# Altium PCB AnalExtend.PcbDoc (part 3 of 3)
Units mm, origin at the board's own origin, x right, y up, seen from the top; angles counter-clockwise.
Board outline 190 x 160 mm, 2 copper layers (Top Layer, Bottom Layer), stack 1.536 mm thick; 277 components, 158 nets, 942 pads, 254 vias.
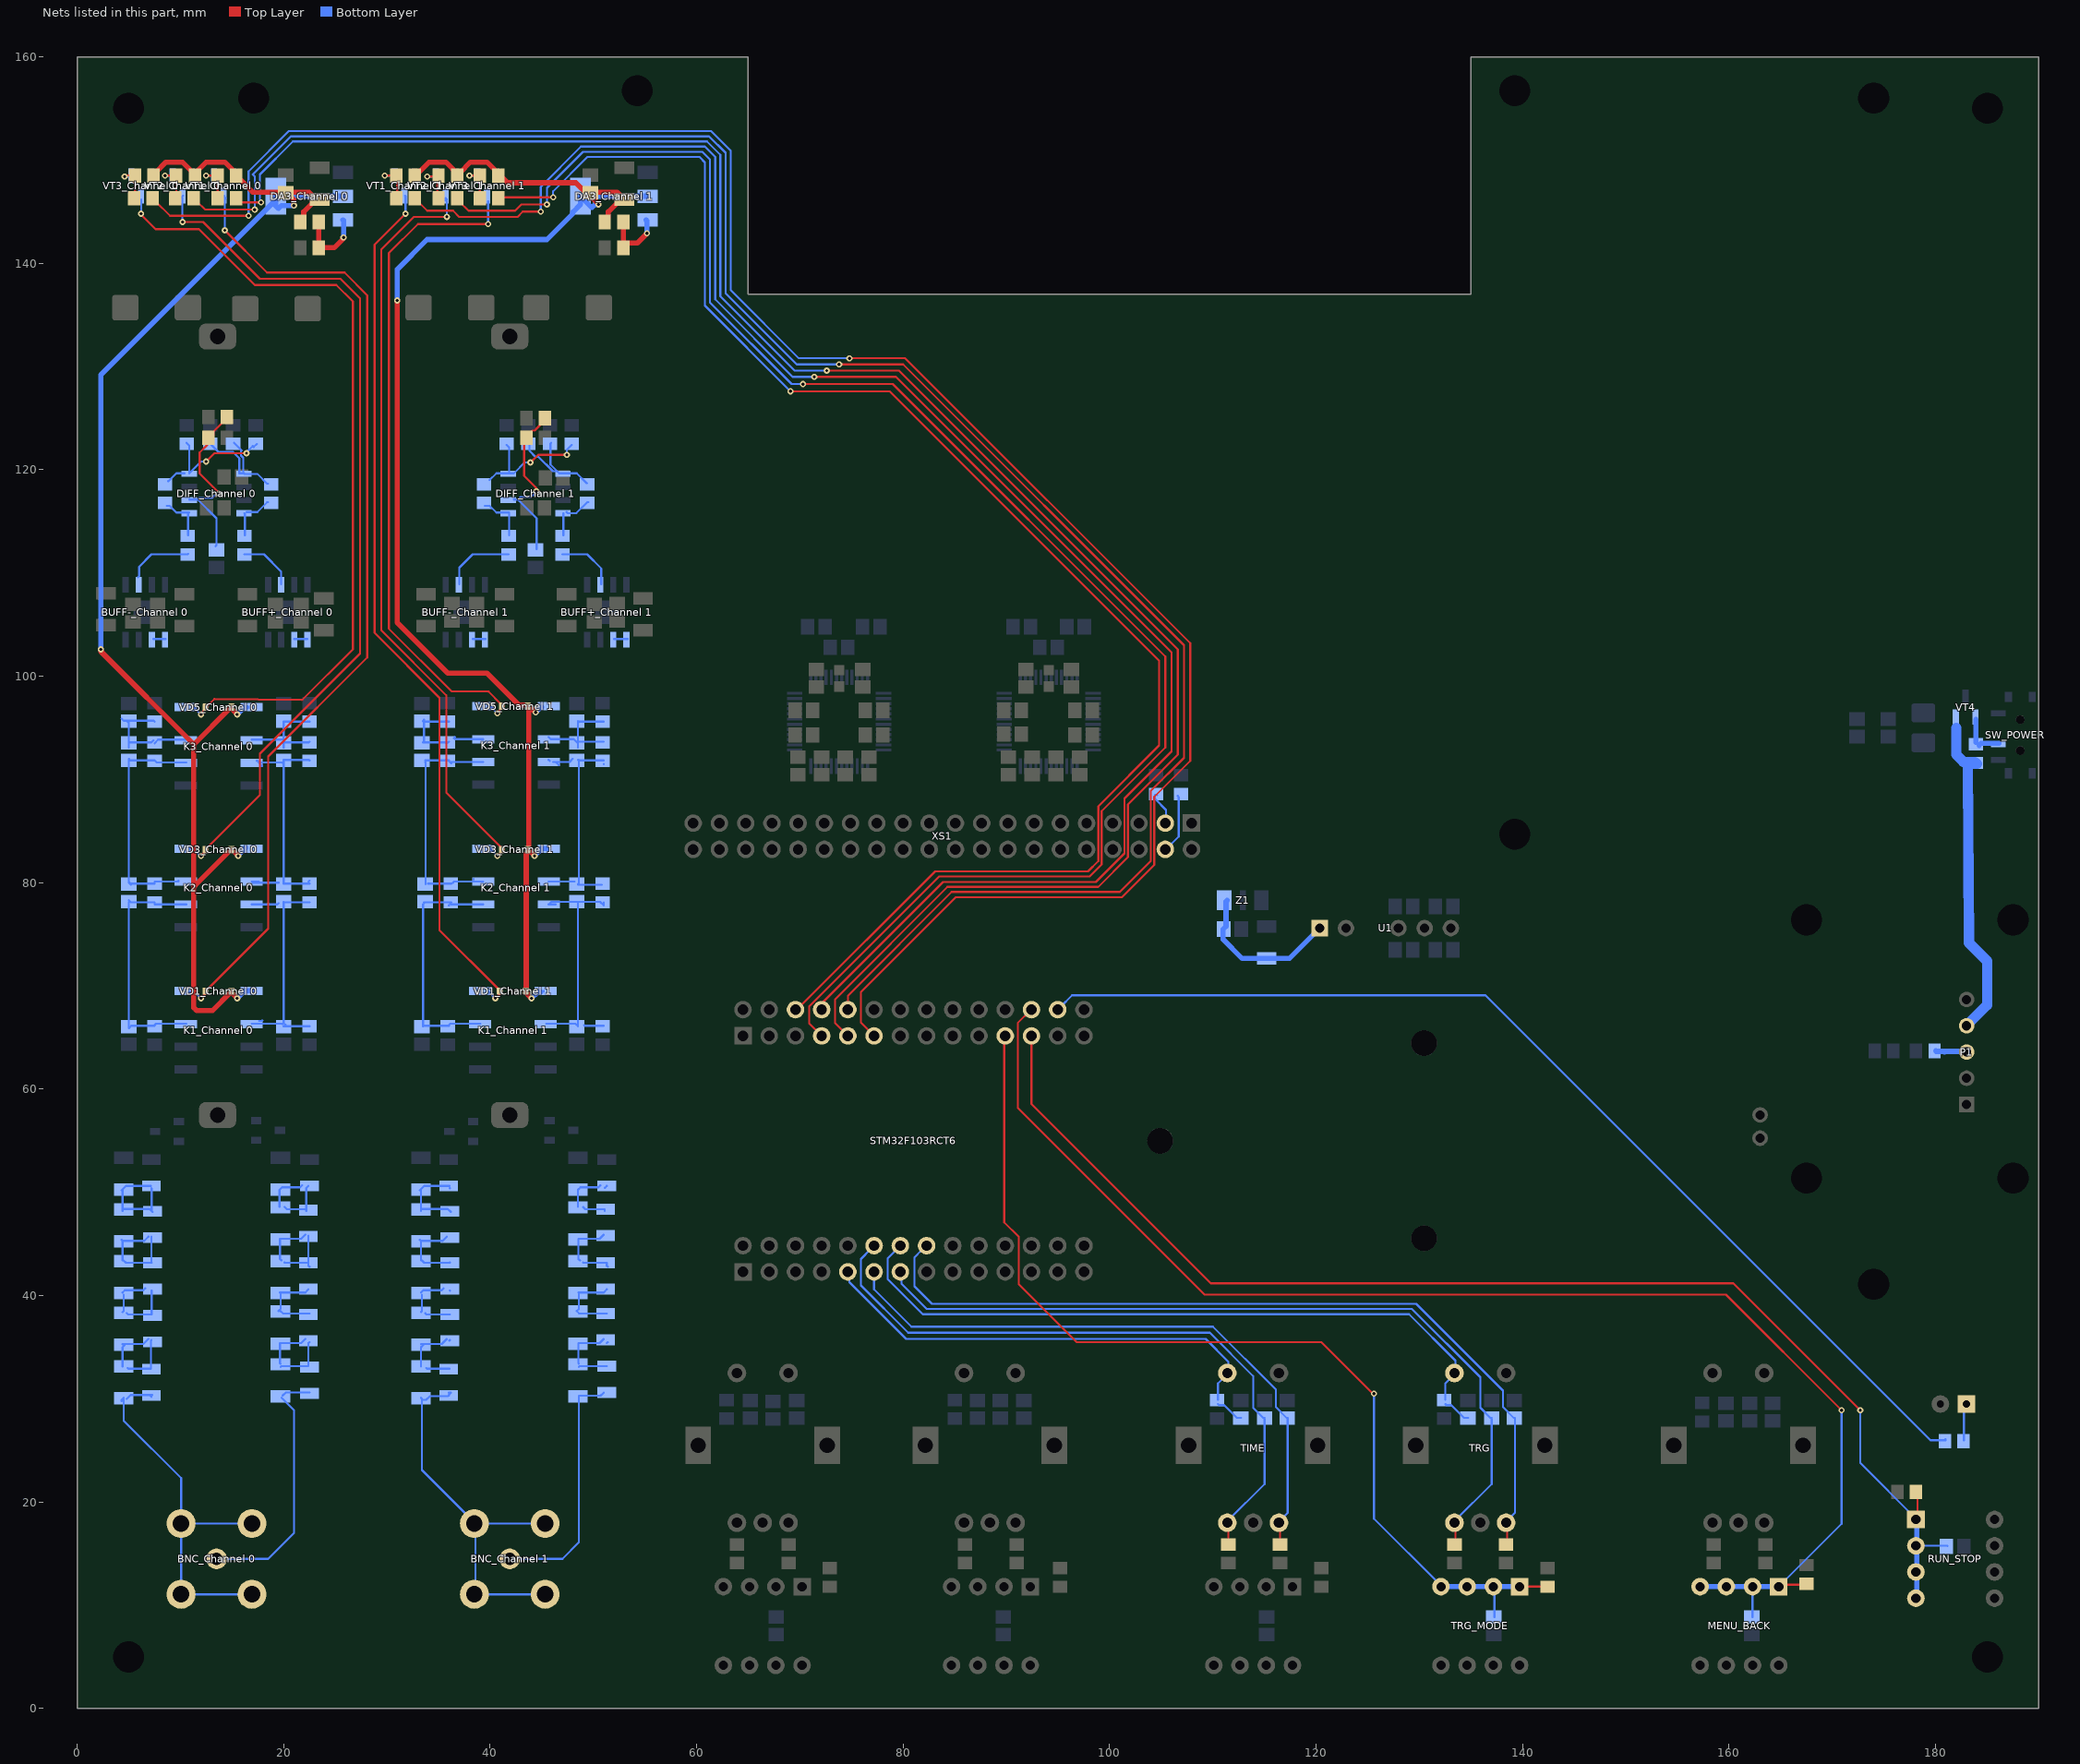
[diagram p3: the nets of this part, all layers, seen from the top]

## Via types
v1: diameter 0.6, hole 0.3, Top Layer to Bottom Layer, tented both sides, 254 vias

## Nets (pads, with @x,y where several pads share a name; then routed paths per layer and width w, separated by ;. In a path a pad name is that pad's centre, name@x,y a point inside that pad or via, vN(x,y) a via of type N, cw(c..) or ccw(c..) an arc to the next point about the centre after c; other vN are vias at no path point) (continued)
"LDO_3V_Channel 0": "C41_Channel 0.1" "C42_Channel 0.1" "DA3_Channel 0.2" "K1_Channel 0.8" "K2_Channel 0.8" "K3_Channel 0.8" "R4_Channel 0.2" "R5_Channel 0.1" "R19_Channel 0.2" "R28_Channel 0.2" "VD1_Channel 0.1" "VD3_Channel 0.1" "VD5_Channel 0.1" | length 142.3
  Top Layer w0.5: v1(2.3,102.6) 2.3,102.4 11.3,93.4 ; 7.6,148.6 7.6,148.8 8.6,149.8 10.2,149.8 11.4,148.6 11.4,148.5 ; 11.398,79.698 14.9,83.2 ; 11.5,148.8 12.5,149.8 14.3,149.8 15.05,149.05 15.05,148.85 15.4,148.5 15.4,148.4 15.75,148.05 15.85,148.05 17,146.9 20.25,146.9 20.35,146.9 20.625,146.625 ; 15,69.3 v1(15.5,68.8) ; 15,69.5 15,69.45 14.95,69.4 14.9,69.4 13.1,67.6 11.593,67.6 11.3,67.893 11.3,79.6 11.3,93.4 ; 15,83.25 15,83.2 v1(15.6,82.6) ; 15,97 15,96.8 v1(15.5,96.3) ; 15,97.1 15,96.95 14.95,96.9 14.8,96.9 11.3,93.4 ; v1(21,145.6) 21,146.15 20.75,146.4 20.75,146.5 20.625,146.625 ; 21.7,144.2 21.95,144.45 21.95,145 23.15,146.2 ; 23.5,146.2 23.15,146.2 ; 20.625,146.625 20.9,146.9 22.45,146.9 23.15,146.2
  Bottom Layer w0.5: v1(2.3,102.6) 2.3,129.2 19,145.9 ; v1(15.5,68.8) 16.25,69.55 16.925,69.55 ; v1(15.5,96.3) 16.2,97 16.4,97 ; v1(15.6,82.6) 15.6,82.65 16.3,83.35 16.3,83.4 ; 19.25,145.7 19.175,145.625 19.5,145.3 19.8,145.6 v1(21,145.6) ; 19.25,145.9 19.25,146.5 ; 19.4,146.5 25.75,146.5
"LDO_3V_Channel 1": "C41_Channel 1.1" "C42_Channel 1.1" "DA3_Channel 1.2" "K1_Channel 1.8" "K2_Channel 1.8" "K3_Channel 1.8" "R4_Channel 1.2" "R5_Channel 1.1" "R19_Channel 1.2" "R28_Channel 1.2" "VD1_Channel 1.1" "VD3_Channel 1.1" "VD5_Channel 1.1" | length 142.1
  Top Layer w0.2: 43.5,69.4 43.5,69.3 43.55,69.25
  Top Layer w0.5: v1(31,136.4) 31,135 31,105.2 35.9,100.3 39.7,100.3 42.8,97.2 43.7,97.2 43.8,97.1 ; 32.6,148.7 33,148.7 34.1,149.8 35.7,149.8 36.9,148.6 36.9,148.5 ; 37,148.8 37.1,148.8 38.1,149.8 39.7,149.8 40.9,148.6 40.9,148.5 ; 41.2,148.3 41.2,148.1 41.3,148.2 41.7,147.8 48.3,147.8 49.2,146.9 49.75,146.9 ; 43.5,69.4 43.5,82.8 43.8,83.1 v1(44.3,82.6) ; 43.6,69.3 43.6,69.2 v1(44,68.8) ; 43.75,83.2 43.75,97.1 43.8,97.1 ; v1(44.4,96.5) 43.8,97.1 ; 49.5,146.7 v1(50.5,145.7) ; 50,146.7 50.2,146.9 52.3,146.9 53,146.2 52.65,146.2 51.45,145 51.45,144.45 51.4,144.4 51.1,144.4
  Bottom Layer w0.2: 44.7,69.4 44.8,69.5 45.2,69.5
  Bottom Layer w0.5: v1(31,136.4) 31,139.4 33.9,142.3 45.5,142.3 48,144.8 48,144.95 48.75,145.7 48.75,146.5 ; v1(44,68.8) 44.6,69.4 44.7,69.4 44.9,69.4 ; v1(44.3,82.6) 45,83.3 45.675,83.3 ; v1(44.4,96.5) 44.9,97 45,97 ; v1(50.5,145.7) 50.15,145.7 49.85,145.4 48.75,146.5 ; 55.25,146.5 48.75,146.5
LED_RUN: R31.2 STM32F103RCT6.26 | length 104.5
  Bottom Layer w0.2: STM32F103RCT6.26@94.9,68 95.27,68 96.37,69.1 136.4,69.1 179.5,26 180.85,26 180.95,26.1 R31.2@180.95,26
MENU: C82.1 MENU_BACK.1 MENU_BACK.2 MENU_BACK.3 MENU_BACK.4 R51.1 STM32F103RCT6.24 | length 134.3
  Top Layer w0.2: STM32F103RCT6.24@92.3,67.6 91.1,66.4 91.1,58.2 109.2,40.1 159.7,40.1 v1(170.9,28.9) ; MENU_BACK.1@164.81,11.81 165,12 R51.1@167.5,12
  Bottom Layer w0.2: C82.1@162.25,8.85 162.27,8.87 162.27,11.23 MENU_BACK.2@162.25,11.25 ; MENU_BACK.1@164.81,11.81 170.9,17.9 v1(170.9,28.9)
  Bottom Layer w0.5: MENU_BACK.4@157.1,11.8 157.11,11.81 MENU_BACK.4@157.19,11.81 MENU_BACK.3@159.73,11.81 MENU_BACK.2@162.27,11.81 MENU_BACK.1@164.81,11.81
"NetBNC_Channel 0_1": "BNC_Channel 0.1" "C45_Channel 0.1" "R7_Channel 0.1" | length 24.9
  Bottom Layer w0.2: 13.5,14.5 18.5,14.5 21,17 21,28.9 19.8,30.1 ; 19.9,30.3 20.225,30.625 22.5,30.625
"NetBNC_Channel 0_2": "BNC_Channel 0.2" "BNC_Channel 0.3" "BNC_Channel 0.4" "BNC_Channel 0.5" "C52_Channel 0.1" "R22_Channel 0.1" | length 37.9
  Bottom Layer w0.2: 4.3,29.8 4.3,29.9 4.5,30.1 4.5,27.9 10.07,22.33 10.07,18.07 10,18 ; 4.8,30 5.175,30.375 7.25,30.375 ; 7.1,30.3 7.2,30.2 ; 10,11.5 10.07,11.57 10.07,17.93 16.93,17.93 17,18 ; 10.07,11.07 16.93,11.07 17,11
"NetBNC_Channel 1_1": "BNC_Channel 1.1" "C45_Channel 1.1" "R7_Channel 1.1" | length 23.9
  Bottom Layer w0.2: 42,14.5 47,14.5 48.6,16.1 48.6,30.2 ; 48.6,30.3 50.7,30.3 51,30.6
"NetBNC_Channel 1_2": "BNC_Channel 1.2" "BNC_Channel 1.3" "BNC_Channel 1.4" "BNC_Channel 1.5" "C52_Channel 1.1" "R22_Channel 1.1" | length 38.5
  Bottom Layer w0.2: 33.3,30.1 33.4,30 33.4,29.9 ; 36,30.6 36.2,30.6 36,30.4 36,30.325 35.925,30.25 34.15,30.25 33.8,29.9 33.4,29.9 ; 38.47,11.17 38.57,11.27 38.57,17.93 33.4,23.1 33.4,29.9 ; 38.57,11.07 45.43,11.07 45.47,11.07 45.6,11.2 ; 38.6,18 38.67,17.93 45.43,17.93 ; 45.3,11.6 45.33,11.63
"NetBUFF+_Channel 0_1": "BUFF+_Channel 0.1" "BUFF+_Channel 0.2" | length 1.3
  Bottom Layer w0.2: 21,103.6 21.035,103.6 22.305,103.6
"NetBUFF+_Channel 0_6": "BUFF+_Channel 0.6" "RG+_Channel 0.1" | length 5.5
  Bottom Layer w0.2: 16.2,111.8 18.1,111.8 19.765,110.135 19.765,108.9
"NetBUFF+_Channel 1_1": "BUFF+_Channel 1.1" "BUFF+_Channel 1.2" | length 1.3
  Bottom Layer w0.2: 52,103.6 52.035,103.6 53.305,103.6
"NetBUFF+_Channel 1_6": "BUFF+_Channel 1.6" "RG+_Channel 1.1" | length 5.9
  Bottom Layer w0.2: 47,111.8 49.4,111.8 50.765,110.435 50.765,108.9
"NetBUFF-_Channel 0_1": "BUFF-_Channel 0.1" "BUFF-_Channel 0.2" | length 1.2
  Bottom Layer w0.2: 7.4,103.6 8.555,103.6
"NetBUFF-_Channel 0_6": "BUFF-_Channel 0.6" "RG-_Channel 0.1" | length 6.3
  Bottom Layer w0.2: 5.9,109.6 6,109.7 6,110.6 7.2,111.8 10.7,111.8 10.75,111.85
"NetBUFF-_Channel 1_1": "BUFF-_Channel 1.1" "BUFF-_Channel 1.2" | length 1.3
  Bottom Layer w0.2: 38.3,103.6 39.555,103.6
"NetBUFF-_Channel 1_6": "BUFF-_Channel 1.6" "RG-_Channel 1.1" | length 6.9
  Bottom Layer w0.2: 37.015,108.9 37.015,110.515 38.3,111.8 41.8,111.8
NetC25_1: C25.1 C26.1 U1.1 Z1.3 | length 15.3
  Bottom Layer w0.5: Z1.3@111.4,78.3 111.275,78.175 111.275,75.775 111,75.5 111,74.5 112.85,72.65 115.3,72.65 117.41,72.65 U1.1@120.36,75.6
"NetC45_Channel 0_2": "C45_Channel 0.2" "C46_Channel 0.1" "R7_Channel 0.2" "R8_Channel 0.1" | length 9.7
  Bottom Layer w0.2: 19.7,33.1 19.775,33.175 22.4,33.175 22.4,35.4 22.5,35.5 ; 19.7,33.4 19.65,33.45 19.65,35.4 21.7,35.4 22.1,35.8
"NetC45_Channel 1_2": "C45_Channel 1.2" "C46_Channel 1.1" "R7_Channel 1.2" "R8_Channel 1.1" | length 7.5
  Bottom Layer w0.2: 48.6,33.1 48.675,33.175 51.3,33.175 ; 48.6,33.4 48.55,33.45 48.55,35.4 50.6,35.4 51,35.8 ; 51.3,35.4 51.4,35.5
"NetC46_Channel 0_2": "C46_Channel 0.2" "C47_Channel 0.1" "R8_Channel 0.2" "R9_Channel 0.1" | length 7.8
  Bottom Layer w0.2: 19.5,38.5 19.7,38.7 19.7,40.25 19.65,40.3 22.1,40.3 22.4,40.6 22.4,40.625 ; 19.6,38.6 19.725,38.475 19.925,38.275 22.5,38.275
"NetC46_Channel 1_2": "C46_Channel 1.2" "C47_Channel 1.1" "R8_Channel 1.2" "R9_Channel 1.1" | length 7.8
  Bottom Layer w0.2: 51.3,38.275 48.625,38.275 48.4,38.5 48.6,38.7 48.6,40.25 48.55,40.3 51,40.3 51.3,40.6 51.3,40.625
"NetC47_Channel 0_2": "C47_Channel 0.2" "C48_Channel 0.1" "R9_Channel 0.2" "R10_Channel 0.1" | length 10.2
  Bottom Layer w0.2: 19.8,43.4 19.65,43.55 19.65,45.5 21.7,45.5 22.1,45.9 ; 20.1,43.2 20.125,43.175 22.4,43.175 ; 22.4,45.825 22.4,43.175 ; 22.5,42.8 22.4,42.9 22.4,43.175
"NetC47_Channel 1_2": "C47_Channel 1.2" "C48_Channel 1.1" "R9_Channel 1.2" "R10_Channel 1.1" | length 7.5
  Bottom Layer w0.2: 48.7,43.4 48.55,43.55 48.55,45.5 50.6,45.5 51,45.9 ; 49,43.2 49.025,43.175 51.3,43.175 51.3,42.9 51.4,42.8
"NetC48_Channel 0_2": "C48_Channel 0.2" "C49_Channel 0.1" "R10_Channel 0.2" "R11_Channel 0.1" | length 8.7
  Bottom Layer w0.2: 19.6,48.6 19.6,50.25 19.65,50.3 19.85,50.5 21.6,50.5 21.8,50.7 ; 20.1,48.6 20.325,48.375 22.2,48.375 ; 22.2,48.2 22.2,48.375 ; 22.4,50.625 22.2,50.425 22.2,48.375
"NetC48_Channel 1_2": "C48_Channel 1.2" "C49_Channel 1.1" "R10_Channel 1.2" "R11_Channel 1.1" | length 6.7
  Bottom Layer w0.2: 48.5,48.6 48.5,50.25 48.55,50.3 48.75,50.5 50.5,50.5 50.7,50.7 ; 49,48.6 49.225,48.375 51.1,48.375 51.1,48.2 ; 51.1,50.425 51.3,50.625
"NetC52_Channel 0_2": "C52_Channel 0.2" "C53_Channel 0.1" "R22_Channel 0.2" "R23_Channel 0.1" | length 9.9
  Bottom Layer w0.2: 4.4,33.15 4.4,35 4.6,35.2 ; 4.4,35.3 4.42,35.32 6.42,35.32 6.9,35.8 ; 4.9,33 4.975,32.925 7.15,32.925 7.15,35.65 7.2,35.7
"NetC52_Channel 1_2": "C52_Channel 1.2" "C53_Channel 1.1" "R22_Channel 1.2" "R23_Channel 1.1" | length 7.2
  Bottom Layer w0.2: 33.3,33.15 33.3,35 33.5,35.2 ; 33.3,35.3 33.32,35.32 35.32,35.32 35.8,35.8 ; 33.8,33 33.875,32.925 36.05,32.925 ; 36.05,35.65 36.1,35.7
"NetC53_Channel 0_2": "C53_Channel 0.2" "C54_Channel 0.1" "R23_Channel 0.2" "R24_Channel 0.1" | length 8.9
  Bottom Layer w0.2: 4.4,38.4 4.5,38.5 4.5,40.1 ; 4.4,40.3 4.62,40.52 6.42,40.52 6.6,40.7 ; 4.8,38.3 4.925,38.175 7.22,38.175 7.22,40.48 7.2,40.5
"NetC53_Channel 1_2": "C53_Channel 1.2" "C54_Channel 1.1" "R23_Channel 1.2" "R24_Channel 1.1" | length 6.6
  Bottom Layer w0.2: 33.3,38.4 33.4,38.5 33.4,40.1 ; 33.3,40.3 33.52,40.52 35.32,40.52 35.5,40.7 ; 33.7,38.3 33.825,38.175 36.12,38.175 ; 36.1,40.5 36.12,40.48
"NetC54_Channel 0_2": "C54_Channel 0.2" "C55_Channel 0.1" "R24_Channel 0.2" "R25_Channel 0.1" | length 10.1
  Bottom Layer w0.2: 4.3,45.4 4.4,45.3 ; 4.4,43.4 4.4,45.3 ; 4.5,43.4 4.725,43.175 7.22,43.175 7.2,43.195 7.2,45.7 ; 6.9,45.7 6.5,45.3 4.4,45.3
"NetC54_Channel 1_2": "C54_Channel 1.2" "C55_Channel 1.1" "R24_Channel 1.2" "R25_Channel 1.1" | length 7.5
  Bottom Layer w0.2: 33.2,45.4 33.3,45.3 ; 33.3,43.4 33.3,45.3 ; 33.4,43.4 33.625,43.175 36.12,43.175 36.1,43.195 ; 35.8,45.7 35.4,45.3 33.3,45.3
"NetC55_Channel 0_2": "C55_Channel 0.2" "C56_Channel 0.1" "R25_Channel 0.2" "R26_Channel 0.1" | length 10.3
  Bottom Layer w0.2: 4.3,50.2 4.725,50.625 7.15,50.625 ; 4.4,48.2 4.4,50.2 ; 4.4,48.4 7,48.4 7.22,48.18 ; 7.2,50.4 7.22,50.38 7.22,48.18 ; 7.3,48.1 7.22,48.18
"NetC55_Channel 1_2": "C55_Channel 1.2" "C56_Channel 1.1" "R25_Channel 1.2" "R26_Channel 1.1" | length 8.1
  Bottom Layer w0.2: 33.2,50.2 33.625,50.625 36.05,50.625 ; 33.3,48.2 33.3,50.2 ; 33.3,48.4 35.9,48.4 36.12,48.18 36.2,48.1 ; 36.1,50.4 36.12,50.38
"NetC61_Channel 0_1": "C61_Channel 0.1" "DIFF_Channel 0.2" "R29_Channel 0.2" "R30_Channel 0.1" | length 16.8
  Top Layer w0.2: 12.6,122.4 11.873,121.673 11.873,119.627 13.7,117.8 v1(13.7,117.7) ; 12.9,123.1 13.2,123.4 13.2,123.7 14.5,125 14.5,125.1
  Bottom Layer w0.2: 10.85,117.115 11.685,117.115 ; 13.4,112.6 13.5,112.7 13.5,115.3 11.685,117.115 ; v1(13.7,117.7) 13.476,117.7 13.049,117.273 11.843,117.273 11.685,117.115
"NetC61_Channel 1_1": "C61_Channel 1.1" "DIFF_Channel 1.2" "R29_Channel 1.2" "R30_Channel 1.1" | length 15.9
  Top Layer w0.2: 43.3,122.8 43.3,119.4 44.475,118.225 v1(44.475,117.9) ; 43.8,123.3 43.8,123.5 44.1,123.8 44.3,123.8 45.4,124.9 45.4,125
  Bottom Layer w0.2: 42.3,117.1 42.7,117.1 44.5,115.3 44.5,112.3 ; 42.7,117.115 42.945,117.36 43.935,117.36 v1(44.475,117.9)
"NetDA3_Channel 0_1": "DA3_Channel 0.1" "R5_Channel 0.2" "R6_Channel 0.2" | length 7
  Top Layer w0.5: 23.4,141.5 24.9,141.5 25.8,142.4 v1(25.8,142.5) ; 23.4,144 23.4,141.7 23.5,141.6
  Bottom Layer w0.5: 25.75,144.21 25.8,144.16 v1(25.8,142.5)
"NetDA3_Channel 1_1": "DA3_Channel 1.1" "R5_Channel 1.2" "R6_Channel 1.2" | length 6.8
  Top Layer w0.5: 52.9,144 52.9,141.6 ; 53,141.4 52.9,141.5 52.9,141.6 ; v1(55.2,142.9) 54.25,141.95 53.25,141.95 52.9,141.6
  Bottom Layer w0.5: 55.1,144.2 55.2,144.1 v1(55.2,142.9)
"NetDIFF_Channel 0_1": "DIFF_Channel 0.1" "RF-_Channel 0.1" "RG-_Channel 0.2" | length 4.6
  Bottom Layer w0.2: 8.7,116.5 8.95,116.5 9.605,115.845 10.75,115.845 10.85,115.845 ; 10.75,113.65 10.75,115.75 10.8,115.8
"NetDIFF_Channel 0_4": "DIFF_Channel 0.4" "RF-_Channel 0.2" "ROUTA+_Channel 0.1" "ROUTB+_Channel 0.1" | length 12.8
  Top Layer w0.2: v1(12.5,120.8) 13.3,121.6 v1(16.4,121.6)
  Bottom Layer w0.2: 8.8,118.9 8.85,118.9 9.605,119.655 10.4,119.655 ; 10.6,122.6 10.85,122.35 10.85,119.655 11.995,120.8 v1(12.5,120.8) ; v1(16.4,121.6) 16.4,121.7 17,122.3 17.05,122.25 17.1,122.2 17.4,122.5
"NetDIFF_Channel 0_5": "DIFF_Channel 0.5" "RF+_Channel 0.2" "ROUTA-_Channel 0.1" "ROUTB-_Channel 0.1" | length 11.4
  Bottom Layer w0.2: 12.9,122.6 13,122.5 13,122.4 13.675,121.725 15.075,121.725 15.7,121.1 15.7,119.655 16.15,119.655 16.205,119.6 17.45,119.6 18.4,118.65 18.5,118.65 ; 15.2,122.6 15.927,121.873 15.873,121.818 15.873,121.382 16.1,121.155 16.1,119.8
"NetDIFF_Channel 0_8": "DIFF_Channel 0.8" "RF+_Channel 0.1" "RG+_Channel 0.2" | length 4.7
  Bottom Layer w0.2: 16.2,115.8 16.25,115.75 16.25,113.65 ; 16.4,115.9 17.45,115.9 18.4,116.85 18.5,116.85
"NetDIFF_Channel 1_1": "DIFF_Channel 1.1" "RF-_Channel 1.1" "RG-_Channel 1.2" | length 4.8
  Bottom Layer w0.2: 39.5,116.5 39.95,116.5 40.605,115.845 41.85,115.845 ; 41.8,115.8 41.85,115.75 41.85,113.65
"NetDIFF_Channel 1_4": "DIFF_Channel 1.4" "RF-_Channel 1.2" "ROUTA+_Channel 1.1" "ROUTB+_Channel 1.1" | length 12.5
  Top Layer w0.2: v1(43.9,120.7) 44.65,121.45 v1(47.425,121.45)
  Bottom Layer w0.2: 39.95,119 40.605,119.655 41.755,119.655 41.8,119.7 ; 41.6,122.4 41.85,122.15 41.85,119.655 42.3,119.655 43.345,120.7 v1(43.9,120.7) ; v1(47.425,121.45) 47.425,121.925 47.9,122.4
"NetDIFF_Channel 1_5": "DIFF_Channel 1.5" "RF+_Channel 1.2" "ROUTA-_Channel 1.1" "ROUTB-_Channel 1.1" | length 10.8
  Bottom Layer w0.2: 43.8,122.4 43.8,121.839 44.387,121.252 44.687,121.252 46.084,119.855 46.5,119.855 46.7,119.655 ; 45.9,122.6 45.848,122.548 45.848,120.507 46.7,119.655 ; 49.4,118.7 49.35,118.7 48.395,119.655 47.15,119.655 46.7,119.655
"NetDIFF_Channel 1_8": "DIFF_Channel 1.8" "RF+_Channel 1.1" "RG+_Channel 1.2" | length 4.7
  Bottom Layer w0.2: 47.1,113.65 47.1,115.8 ; 47.4,115.9 47.5,115.8 48.35,115.8 49.4,116.85 49.5,116.85
"NetK1_Channel 0_1": "K1_Channel 0.1" "VD1_Channel 0.2" "VT1_Channel 0.3" | length 96.2
  Top Layer w0.2: v1(12,68.8) 12.371,69.171 12.371,69.371 12.5,69.5 ; 12.4,69.6 12.55,69.6 18.5,75.55 18.5,92.227 28.1,101.827 28.1,136.9 25.9,139.1 18.4,139.1 v1(14.3,143.2)
  Bottom Layer w0.2: 10.8,69.4 11.4,69.4 v1(12,68.8) ; 14.25,146.55 14.2,146.5 14.4,146.3 14.3,146.2 v1(14.3,143.2)
"NetK1_Channel 1_1": "K1_Channel 1.1" "VD1_Channel 1.2" "VT1_Channel 1.3" | length 85.2
  Top Layer w0.2: v1(31.8,144.8) 28.8,141.8 28.8,104.2 35.1,97.9 35.1,75.4 40.9,69.6 ; v1(40.5,68.8) 40.871,69.171 40.871,69.371 41,69.5
  Bottom Layer w0.2: 31.75,146.55 31.8,146.5 v1(31.8,144.8) ; 39.7,69.5 39.8,69.5 v1(40.5,68.8)
"NetK2_Channel 0_1": "K2_Channel 0.1" "VD3_Channel 0.2" "VT2_Channel 0.3" | length 84.5
  Top Layer w0.2: v1(10.2,144) 12.2,144 17.7,138.5 25.5,138.5 27.4,136.6 27.4,102.2 17.7,92.5 17.7,88.5 12.6,83.4 ; v1(12,82.6) 12.371,82.971 12.371,83.121 12.5,83.25
  Bottom Layer w0.2: v1(10.2,144) 10.2,146.3 10.1,146.4 10.25,146.55 ; 10.9,83.3 11.25,83.3 11.95,82.6 v1(12,82.6)
"NetK2_Channel 1_1": "K2_Channel 1.1" "VD3_Channel 1.2" "VT2_Channel 1.3" | length 74.4
  Top Layer w0.2: v1(35.8,144.5) 32.6,144.5 29.45,141.35 29.45,104.45 35.75,98.15 35.75,88.75 41.25,83.25 41.25,83.2 ; v1(40.7,82.6) 41.25,83.15
  Bottom Layer w0.2: 35.7,146.3 35.8,146.2 35.7,146.1 35.8,146 v1(35.8,144.5) ; 40,83.3 v1(40.7,82.6)
"NetK3_Channel 0_1": "K3_Channel 0.1" "VD5_Channel 0.2" "VT3_Channel 0.3" | length 77.6
  Top Layer w0.2: v1@6.2,144.7 7.6,143.3 11.8,143.3 17.2,137.9 25.1,137.9 26.7,136.3 26.7,105.8 26.7,102.7 ; v1(12,96.3) 12.048,96.348 12.048,96.498 12.5,96.95 12.5,97 12.5,97.05 12.7,97.25 12.75,97.25 13.3,97.8 21.8,97.7 26.7,102.6
  Bottom Layer w0.2: v1(6.2,144.8) 6.2,146.2 ; 11.2,97 11.3,97 v1(12,96.3)
"NetK3_Channel 1_1": "K3_Channel 1.1" "VD5_Channel 1.2" "VT3_Channel 1.3" | length 65.8
  Top Layer w0.2: v1(39.8,143.8) 33,143.8 30.2,141 30.2,104.6 36.275,98.525 36.575,98.525 39.85,98.5 41,97.35 41.05,97.35 41.25,97.15 41.25,97.1 41.25,97.05 41.2,97 ; v1(40.7,96.4) 40.748,96.448 40.748,96.548 41.2,97 ; 41.2,97.1 41.2,97
  Bottom Layer w0.2: 39.8,97.1 40,97.1 v1(40.7,96.4) ; v1(39.8,143.8) 39.8,146
NetLED_RUN_1: LED_RUN.1 R31.1 | length 3.6
  Bottom Layer w0.2: R31.1@182.75,26 182.75,29.21 LED_RUN.1@183.04,29.5
NetP1_3: P1.3 R32.1 | length 5.2
  Bottom Layer w0.5: R32.1@180,63.7 180.04,63.66 180.877,63.66 182.96,63.66 183,63.62 180.897,63.62 180.877,63.6
NetP1_4: P1.4 R55.2 VT4.2 | length 32.6
  Bottom Layer w1: 182,95 182,92.4 182.7,91.7 183.8,91.7 R55.2@183.9,91.6 ; P1.4@183,66.16 185,68.16 185,72.4 183.233,74.167 183.132,91.5 R55.2@184,91.5
NetR1_1: R1.1 XS1.3 | length 3.4
  Bottom Layer w0.2: R1.1@104.6,88.5 104.4,88.5 104.4,88.11 105.47,87.039 XS1.3@105.47,85.79
NetR2_1: R2.1 XS1.4 | length 5.7
  Bottom Layer w0.2: XS1.4@105.47,83.25 106.7,84.48 106.7,88.3 R2.1@106.6,88.4
"NetR3_Channel 0_2": "R3_Channel 0.2" "R4_Channel 0.1" "VT1_Channel 0.1" | length 3.9
  Top Layer w0.2: v1(12.5,148.5) 13.3,148.5 13.4,148.4 ; 13.6,146.25 13.6,148.4
  Bottom Layer w0.2: v1(12.5,148.5) 13.25,148.5 13.3,148.45
"NetR3_Channel 1_2": "R3_Channel 1.2" "R4_Channel 1.1" "VT1_Channel 1.1" | length 4.6
  Top Layer w0.2: v1(29.8,148.5) 31,148.5 ; 31,146.3 31,148.5 ; 31,148.6 31,148.5
  Bottom Layer w0.2: v1(29.8,148.5) 30.9,148.5
"NetR16_Channel 0_2": "R16_Channel 0.2" "R19_Channel 0.1" "VT2_Channel 0.1" | length 3.9
  Top Layer w0.2: v1(8.5,148.5) 9.6,148.5 ; 9.6,146.25 9.6,148.3
  Bottom Layer w0.2: v1(8.5,148.5) 9.1,148.5 9.2,148.4
"NetR16_Channel 1_2": "R16_Channel 1.2" "R19_Channel 1.1" "VT2_Channel 1.1" | length 4.1
  Top Layer w0.2: v1(33.9,148.4) 34.8,148.4 ; 34.9,148.5 34.9,146.4 35,146.3
  Bottom Layer w0.2: v1(33.9,148.4) 34.75,148.4 34.8,148.45
"NetR27_Channel 0_2": "R27_Channel 0.2" "R28_Channel 0.1" "VT3_Channel 0.1" | length 3.5
  Top Layer w0.2: v1(4.6,148.4) 4.7,148.5 5.5,148.5 ; 5.6,146.7 5.6,148.5
  Bottom Layer w0.2: v1(4.6,148.4) 5.25,148.4 5.3,148.45
"NetR27_Channel 1_2": "R27_Channel 1.2" "R28_Channel 1.1" "VT3_Channel 1.1" | length 4
  Top Layer w0.2: v1(38,148.5) 39,148.5 39,146.3
  Bottom Layer w0.2: v1(38,148.5) 38.8,148.5
NetR55_1: R55.1 SW_POWER.2 VT4.1 | length 4.2
  Bottom Layer w0.5: R55.1@183.9,93.6 VT4.1@183.9,95.8 ; R55.1@184.2,93.3 184.4,93.5 SW_POWER.2@186.15,93.5
RELAY_A1: "R3_Channel 0.1" STM32F103RCT6.9 | length 183.8
  Top Layer w0.2: 15.5,146.1 15.6,146.2 15.9,145.9 v1(17.8,145.9) ; v1(72.6,129.6) 79.6,129.6 106.6,102.6 106.6,92.4 101.773,87.573 101.773,82.473 98.9,79.6 84.3,79.6 73.4,68.7 73.4,66.41 STM32F103RCT6.9@74.65,65.16
  Bottom Layer w0.2: 17.7,146.2 17.7,148.6 20.9,151.8 61,151.8 62.3,150.5 62.3,136.8 69.5,129.6 v1(72.6,129.6)
RELAY_A2: "R16_Channel 0.1" STM32F103RCT6.10 | length 188.2
  Top Layer w0.2: 11.25,145.95 11.65,145.95 12.4,145.2 v1(17.2,145.2) ; v1(73.8,130.2) 80,130.2 107.2,103 107.2,92.1 103.975,88.875 103.975,82.075 101,79.1 84.7,79.1 74.65,69.05 STM32F103RCT6.10@74.65,67.7
  Bottom Layer w0.2: v1(17.2,145.2) 17.2,148.4 17,148.6 20.7,152.3 61.2,152.3 62.8,150.7 62.8,137.1 69.7,130.2 v1(73.8,130.2)
RELAY_A3: "R27_Channel 0.1" STM32F103RCT6.11 | length 196.7
  Top Layer w0.2: 7.3,146 7.6,146 9,144.6 v1(16.6,144.6) ; v1(74.8,130.8) 80.2,130.8 107.8,103.2 107.8,91.8 104.313,88.313 104.313,81.713 101.2,78.6 85.1,78.6 75.9,69.4 75.9,66.45 STM32F103RCT6.11@77.19,65.16
  Bottom Layer w0.2: v1(16.6,144.6) 16.6,148.9 20.5,152.8 61.4,152.8 63.3,150.9 63.3,137.4 69.9,130.8 v1(74.8,130.8)
RELAY_B1: "R3_Channel 1.1" STM32F103RCT6.8 | length 163.5
  Top Layer w0.2: 33,145.9 33.1,145.9 33.9,145.1 36.4,145.1 37,144.5 42.666,144.5 43.166,145 v1(44.9,145) ; v1(71.4,129) 79.3,129 106,102.3 106,92.716 101.446,88.162 101.446,82.843 98.676,80.073 83.873,80.073 72.11,68.31 STM32F103RCT6.8@72.11,67.7
  Bottom Layer w0.2: v1(44.9,145) 44.9,147.4 48.8,151.3 60.8,151.3 61.8,150.3 61.8,136.5 69.3,129 v1(71.4,129)
RELAY_B2: "R16_Channel 1.1" STM32F103RCT6.7 | length 160.6
  Top Layer w0.2: 36.9,146 37,146 37.9,145.1 42.416,145.1 43.016,145.7 v1(45.5,145.7) ; v1(70.3,128.3) 79,128.3 105.4,101.9 105.4,93.1 99.233,86.933 99.233,81.771 98.062,80.6 83.487,80.6 70.9,68.013 70.9,66.37 STM32F103RCT6.7@72.11,65.16
  Bottom Layer w0.2: v1(45.5,145.7) 45.5,147.3 49,150.8 60.562,150.8 61.3,150.062 61.3,136.2 69.2,128.3 v1(70.3,128.3)
RELAY_B3: "R27_Channel 1.1" STM32F103RCT6.6 | length 151.3
  Top Layer w0.2: 41,146.4 41.1,146.3 41.2,146.4 v1(46.1,146.4) ; v1(69.1,127.6) 78.7,127.6 104.8,101.5 104.8,93.3 98.906,87.406 98.906,82.106 97.9,81.1 83.1,81.1 69.7,67.7 STM32F103RCT6.6@69.57,67.7
  Bottom Layer w0.2: v1(46.1,146.4) 46.1,146.971 49.429,150.3 60.275,150.3 60.8,149.775 60.8,135.9 v1(69.1,127.6)
RUN: C66.1 R35.1 RUN_STOP.1 RUN_STOP.2 RUN_STOP.3 RUN_STOP.4 STM32F103RCT6.23 | length 125
  Top Layer w0.2: STM32F103RCT6.23@92.5,64.6 92.43,64.53 92.43,58.57 109.8,41.2 160.4,41.2 v1(172.7,28.9) ; R35.1@178,20.75 178.133,20.75 178.25,20.633 178.25,18.37 RUN_STOP.1@178.19,18.31
  Bottom Layer w0.2: v1(172.7,28.9) 172.7,23.8 RUN_STOP.1@178.19,18.31 ; RUN_STOP.2@178.25,15.75 178.27,15.77 181.13,15.77 C66.1@181.15,15.75
  Bottom Layer w0.5: RUN_STOP.4@177.9,10.5 178.19,10.79 RUN_STOP.3@178.19,13.23 ; RUN_STOP.2@178,15.8 178.19,15.99 RUN_STOP.1@178.19,18.31 ; RUN_STOP.3@178.1,13.3 178.19,13.39 RUN_STOP.2@178.19,15.77
"STEP1+_Channel 0": "C44_Channel 0.2" "C51_Channel 0.1" "K1_Channel 0.7" "K2_Channel 0.6" "R13_Channel 0.1" "R15_Channel 0.2" | length 23
  Bottom Layer w0.2: 16.925,66.35 19.85,66.35 19.9,66.3 ; 16.925,77.9 19.4,77.9 19.5,78 ; 17.6,66.6 17.85,66.6 17.9,66.65 17.95,66.65 ; 20,66.1 22.5,66.1 ; 20.2,66.2 20,66.4 20,78.15 20.05,78.1 22.5,78.1
"STEP1+_Channel 1": "C44_Channel 1.2" "C51_Channel 1.1" "K1_Channel 1.7" "K2_Channel 1.6" "R13_Channel 1.1" "R15_Channel 1.2" | length 23.6
  Bottom Layer w0.2: 45.425,66.35 48.25,66.35 48.4,66.2 ; 46.35,77.9 45.675,77.9 45.925,78.15 48.5,78.15 ; 48.5,66.1 48.5,78.15 ; 49.1,66.2 49.15,66.15 51,66.15 ; 51,78.1 51,77.8 50.65,78.15 48.5,78.15
"STEP1-_Channel 0": "C43_Channel 0.2" "C50_Channel 0.1" "K1_Channel 0.2" "K2_Channel 0.3" "R12_Channel 0.1" "R14_Channel 0.2" | length 23.9
  Bottom Layer w0.2: 5,78.15 5,66.1 5,65.9 5.25,66.15 7.5,66.15 7.5,66.2 7.65,66.35 10.575,66.35 ; 5,78.3 5.2,78.1 7.5,78.1 7.5,77.9 10.575,77.9
"STEP1-_Channel 1": "C43_Channel 1.2" "C50_Channel 1.1" "K1_Channel 1.2" "K2_Channel 1.3" "R12_Channel 1.1" "R14_Channel 1.2" | length 23.8
  Bottom Layer w0.2: 33.5,66.1 33.5,66.15 ; 33.6,78.1 33.7,78.1 ; 36,66.15 33.5,66.15 ; 36,66.2 36.15,66.35 39.075,66.35 ; 36,77.8 36.15,77.95 36.2,78 ; 36.2,77.9 39.325,77.9 ; 36.25,78.1 36.2,78.1 33.7,78.1 ; 33.5,66.15 33.5,77.9 33.65,78.05 33.7,78.1
"STEP2+_Channel 0": "C51_Channel 0.2" "C58_Channel 0.1" "K2_Channel 0.7" "K3_Channel 0.6" "R15_Channel 0.1" "R18_Channel 0.2" | length 23.7
  Bottom Layer w0.2: 17.4,91.8 17.45,91.8 17.6,91.65 ; 17.6,80.1 16.925,80.1 17.025,80 19.5,80 ; 17.9,91.3 17.9,91.35 17.6,91.65 ; 20,91.5 19.85,91.65 17.6,91.65 ; 22.4,80.1 22.5,80.2 ; 22.5,79.9 20,79.9 20,91.9 22.45,91.9 22.5,91.85
"STEP2+_Channel 1": "C51_Channel 1.2" "C58_Channel 1.1" "K2_Channel 1.7" "K3_Channel 1.6" "R15_Channel 1.1" "R18_Channel 1.2" | length 22
  Bottom Layer w0.2: 45.675,80.1 46.35,80.1 48.2,80.1 ; 45.675,91.9 45.775,91.8 ; 46.1,91.7 46.35,91.7 ; 46.65,91.4 46.35,91.7 ; 48,92 47.7,91.7 46.35,91.7 ; 48.5,91.9 48.55,91.85 48.6,91.85 ; 48.6,91.9 48.6,91.85 ; 50.8,79.8 48.55,79.8 48.5,79.85 48.6,79.95 48.6,91.85 ; 51,91.85 48.6,91.85
"STEP2-_Channel 0": "C50_Channel 0.2" "C57_Channel 0.1" "K2_Channel 0.2" "K3_Channel 0.3" "R14_Channel 0.1" "R17_Channel 0.2" | length 22.9
  Bottom Layer w0.2: 5,91.9 5,80 5.075,79.925 5.2,79.8 ; 5,92 5.15,91.85 7.5,91.85 7.7,91.65 10.575,91.65 ; 5.1,80 5.2,79.9 7.5,79.9 7.5,80.1 9.8,80.1 9.8,80.2
"STEP2-_Channel 1": "C50_Channel 1.2" "C57_Channel 1.1" "K2_Channel 1.2" "K3_Channel 1.3" "R14_Channel 1.1" "R17_Channel 1.2" | length 23
  Bottom Layer w0.2: 33.7,91.7 33.75,91.65 33.75,79.85 ; 33.7,91.85 36,91.85 ; 34,79.9 36.25,79.9 ; 36,91.8 36.1,91.7 ; 36.25,91.55 36.1,91.7 ; 36.4,80 36.5,80.1 39.325,80.1 ; 38.4,80.3 38.4,80.35 ; 39.325,91.7 36.1,91.7
"STEP3+_Channel 0": "C58_Channel 0.2" "C60_Channel 0.1" "K3_Channel 0.7" "R18_Channel 0.1" "R21_Channel 0.2" | length 10.7
  Bottom Layer w0.2: 16.925,93.85 19.85,93.85 20,94 ; 20,93.1 20,95.6 22.5,95.6 ; 20,93.6 22.45,93.6 22.5,93.65
"STEP3+_Channel 1": "C58_Channel 1.2" "C60_Channel 1.1" "K3_Channel 1.7" "R18_Channel 1.1" "R21_Channel 1.2" | length 10.7
  Bottom Layer w0.2: 45.675,94.1 45.875,93.9 48.1,93.9 48.5,93.5 ; 48.5,93.1 48.5,95.5 48.6,95.6 ; 48.5,93.6 48.55,93.65 51,93.65 ; 48.5,95.65 48.55,95.6 51,95.6
"STEP3-_Channel 0": "C57_Channel 0.2" "C59_Channel 0.1" "K3_Channel 0.2" "R17_Channel 0.1" "R20_Channel 0.2" | length 11.6
  Bottom Layer w0.2: 4.3,95.9 4.5,95.7 7.4,95.7 7.5,95.6 ; 4.9,95.6 5,95.5 5,93.1 ; 5,93.6 7.2,93.6 7.4,93.8 ; 7.5,93.5 7.85,93.85 10.575,93.85
"STEP3-_Channel 1": "C57_Channel 1.2" "C59_Channel 1.1" "K3_Channel 1.2" "R17_Channel 1.1" "R20_Channel 1.2" | length 10.1
  Bottom Layer w0.2: 33.5,95.65 33.55,95.6 36,95.6 ; 33.6,95.8 33.6,93.7 33.5,93.6 35.95,93.6 36,93.65 ; 36.5,94 36.6,94.1 ; 36.6,93.9 39.325,93.9
TIME_A: C71.1 R40.1 STM32F103RCT6.40 TIME.A | length 63.8
  Top Layer w0.2: R40.1@111.5,15.9 TIME.A@111.5,18
  Bottom Layer w0.2: STM32F103RCT6.40@76.8,44.7 76.8,44.45 75.9,43.55 75.9,41 80.5,36.4 109.7,36.4 113.9,32.2 113.9,29.15 114.9,28.15 C71.1@115,28.15 ; TIME.A@111.5,18 111.5,18.25 115,21.75 C71.1@115,28
TIME_B: C72.1 R42.1 STM32F103RCT6.39 TIME.B | length 60.3
  Top Layer w0.2: R42.1@116.5,15.9 TIME.B@116.5,18
  Bottom Layer w0.2: STM32F103RCT6.39@77.2,42 77.19,41.99 77.19,40.61 80.8,37 110,37 116.1,30.9 116.1,29.2 117.15,28.15 117.25,28.15 117.25,18.947 116.303,18 TIME.B@116.25,18
TIME_ENC: C73.2 R41.1 STM32F103RCT6.37 TIME.D | length 47.3
  Bottom Layer w0.2: STM32F103RCT6.37@74.8,41.9 74.8,41.3 80.3,35.8 109.3,35.8 111.5,33.6 TIME.D@111.5,32.5 ; R41.1@110.5,29.5 110.6,29.4 111.1,29.4 112.35,28.15 C73.2@112.75,28.15 ; R41.1@110.5,29.9 110.5,31.5 111.25,32.25 TIME.D@111.5,32.25
TRG_A: C67.1 R36.1 STM32F103RCT6.41 TRG.A | length 78.8
  Top Layer w0.2: R36.1@133.5,15.9 TRG.A@133.5,18
  Bottom Layer w0.2: STM32F103RCT6.41@79.7,42.1 79.85,41.95 79.85,41.15 82.3,38.7 129.3,38.7 135.9,32.1 135.9,29.15 136.9,28.15 C67.1@137,28.15 ; TRG.A@133.5,18 133.5,18.25 137,21.75 C67.1@137,28
TRG_B: C68.1 R38.1 STM32F103RCT6.44 TRG.B | length 81.2
  Top Layer w0.2: R38.1@138.5,15.9 TRG.B@138.5,18
  Bottom Layer w0.2: STM32F103RCT6.44@81.8,44.7 81.8,44.4 81.1,43.7 81.1,40.9 82.8,39.2 129.7,39.2 138.1,30.8 138.1,29.2 139.15,28.15 139.25,28.15 139.25,18.947 138.303,18 TRG.B@138.25,18
TRG_ENC: C69.2 R37.1 STM32F103RCT6.42 TRG.D | length 68.9
  Bottom Layer w0.2: STM32F103RCT6.42@79.7,44.7 79.59,44.7 78.5,43.61 78.5,41.6 81.9,38.2 129,38.2 133.5,33.7 TRG.D@133.5,32.5 ; R37.1@132.5,29.5 132.6,29.4 133.1,29.4 134.35,28.15 C69.2@134.75,28.15 ; R37.1@132.5,29.9 132.5,31.5 133.25,32.25 TRG.D@133.5,32.25
TRG_MODE: C65.1 R34.1 STM32F103RCT6.21 TRG_MODE.1 TRG_MODE.2 TRG_MODE.3 TRG_MODE.4 | length 97.3
  Top Layer w0.2: STM32F103RCT6.21@89.8,64.9 89.8,47.1 91.2,45.7 91.2,41.1 96.8,35.5 120.5,35.5 125.5,30.5 v1(125.6,30.5) ; TRG_MODE.1@139.81,11.81 142.19,11.81 R34.1@142.25,11.75
  Bottom Layer w0.2: v1(125.6,30.5) 125.6,18.4 TRG_MODE.4@132.19,11.81 ; C65.1@137.25,8.85 137.27,8.87 137.27,11.48 TRG_MODE.2@137.25,11.5
  Bottom Layer w0.5: TRG_MODE.4@132.19,11.81 134.73,11.81 137.27,11.81 TRG_MODE.1@139.81,11.81
pads on no net: "BUFF+_Channel 0.5" "BUFF+_Channel 1.5" "BUFF-_Channel 0.5" "BUFF-_Channel 1.5" "C30_Channel 0.0" "C30_Channel 1.0" "C36_Channel 0.0" "C36_Channel 1.0" "DIFF_Channel 0.7" "DIFF_Channel 1.7" "K1_Channel 0.4" "K1_Channel 0.5" "K1_Channel 1.4" "K1_Channel 1.5" "K2_Channel 0.4" "K2_Channel 0.5" "K2_Channel 1.4" "K2_Channel 1.5" "K3_Channel 0.4" "K3_Channel 0.5" "K3_Channel 1.4" "K3_Channel 1.5" "VD1_Channel 0.0" "VD1_Channel 1.0" "VD3_Channel 0.0" "VD3_Channel 1.0" "VD5_Channel 0.0" "VD5_Channel 1.0" C62.0 DA1.25 DA1.26 DA1.35 DA1.36 DA2.25 DA2.26 DA2.35 DA2.36 FUNC. SET_CH0. SET_CH1. STM32F103RCT6.1 STM32F103RCT6.2 STM32F103RCT6.3 STM32F103RCT6.4 STM32F103RCT6.5 STM32F103RCT6.12 STM32F103RCT6.13 STM32F103RCT6.14 STM32F103RCT6.15 STM32F103RCT6.16 STM32F103RCT6.18 STM32F103RCT6.25 STM32F103RCT6.27 STM32F103RCT6.29 STM32F103RCT6.30 STM32F103RCT6.32 STM32F103RCT6.43 STM32F103RCT6.45 STM32F103RCT6.46 STM32F103RCT6.47 STM32F103RCT6.48 STM32F103RCT6.50 STM32F103RCT6.53 STM32F103RCT6.54 SW_POWER. SW_POWER.3 TIME. TRG. USB-HUB.
copper on no net: | length 0.1
  Bottom Layer w0.5: 186.125,96.55 186.175,96.5

## Polygon pours and split planes (outlines as drawn)
GND on Bottom Layer "Bottom Layer-GND 2" (solid, remove dead copper, pour order 8): 188,4 188,100 147,100 147,80 60,80 60,4
GND on Bottom Layer "Bottom Layer-GND 1" (solid, remove dead copper, pour order 4): 2,155 2,134 63,134 63,155
GND on Bottom Layer "Bottom Layer-GND" (solid, remove dead copper, pour order 0): 56,102 2,102 2,114 56,114
no net on Bottom Layer "Bottom Layer-No Net" (solid, pour order 6): 97,98.8
GND on Top Layer "Top Layer-GND" (solid, remove dead copper, pour order 2): 63,155 63,135 137,135 137,155 188,155 188,4 60,4 60,102 2,102 2,155

## Keep-outs
Keep-Out Layer:
  lines w0.5: 43.375,52.05 43.375,28.125 cw(c41.875,28.125) 40.375,28.125 40.375,52.125 cw(c41.875,52.125) 43.375,52.125 ; 0,0 0,160 65,160 65,137 135,137 135,160 190,160 190,0 0,0 ; 12.125,28.125 ccw(c13.625,28.125) 15.125,28.125 15.125,52.125 ccw(c13.625,52.125) 12.125,52.125 12.125,28.125 ; 26.5,8.525 ccw(c28,8.525) 29.5,8.525 29.5,30 29.5,55.5 ccw(c28,55.5) 26.5,55.5 26.5,30 26.5,8.525 ; 26.5,62.525 ccw(c28,62.525) 29.5,62.525 29.5,95.275 ccw(c28,95.275) 26.5,95.275 26.5,62.525 ; 54.5,8.5 ccw(c56,8.5) 57.5,8.5 57.5,95.5 ccw(c56,95.5) 54.5,95.5 54.5,8.5 ; 111.125,82.75 ccw(c112.125,82.75) 112.125,81.75 133.125,81.75 ccw(c133.125,82.75) 134.125,82.75 134.125,85.75 ccw(c133.125,85.75) 133.125,86.75 112.125,86.75 ccw(c112.125,85.75) 111.125,85.75 111.125,82.75

## Other copper
Bottom Layer:
  pour cut-out: 180.5,90.4
  pour cut-out: 188,95.6 187.9,95.7 179.3,95.5 177.9,95.5 178,94.4 182.4,94.1 188,94.1

## Silkscreen, mask and mechanical layers (free items; w line width, h text height)
Top Overlay:
  text "D+" at 160,57.25 h1
  text "D-" at 160,54.75 h1
Bottom Overlay:
  circle w0.254: c13.5,14.5 r6.8
  circle w0.254: c42,14.5 r6.8
  lines w0.254: 2,7 2,131.2 28.2,131.2 56,131.2 56,97.5 ; 2.1,59.5 26.5,59.5 54,59.5 ; 2.1,102.5 55.9,102.5 ; 28,140 28,151.5 ; 28.5,97.5 28.5,100 ; 28.5,102.6 28.5,128.6 ; 58,38 189,38 ; 64.75,135 64.75,131.5 135,131.5 135,135 ; 65.1,87.3 109.6,87.3 109.6,109.8 65.1,109.8 65.1,87.4 ; 77.5,3.25 77.5,38 ; 84.3,87.3 84.3,109.8 ; 101.25,3.25 101.25,38 ; 102.3,87.3 102.3,109.8 ; 108,131.5 108,135 ; 109.2,81.85 109.2,77.9 58.6,77.9 58.6,81.9 ; 111.5,87.25 111.5,91.75 134.25,91.75 ; 117.25,87.25 117.25,91.75 ; 122.75,87.25 122.75,91.75 ; 125,3.25 125,38 ; 128,45.75 101.75,45.75 101.75,64.5 128,64.5 ; 128.25,87.25 128.25,91.75 ; 132.75,45.75 132.75,64.5 ; 134.25,87.25 134.25,91.75 ; 136.5,79.45 136.5,69.95 109.75,69.95 109.75,79.25 109.75,81.25 136.5,81.25 136.5,79.5 ; 148.5,3.25 148.5,38 ; 172,3.25 172,38 ; 186,88 186,85 145,85 145,151 186,151 186,103 ; 189,49 165,49 165,64 165,78.5 189,78.5 ; 189,89 188,89 171,89 171,90 171,100 189,100 ; 58.6,81.9 58.6,81.9 ; 134.25,91.75 134.25,91.75 ; 2,140 2,154 58,154 58,140 2,140 ; 63.25,41 63.25,69 98.75,69 98.75,41 63.25,41
  text "Relay Control" at 37,152.1 h1.5
  text "Li-Ion Battery" at 182,145 h2.5
  text "Channel 1" at 24.7,134.7 h2.5
  text "Channel 2" at 52.7,134.6 h2.5
  text "ETHERNET" at 96,132.5 h2.5
  text "OLED" at 126.5,132.5 h2.5
  text "Diff Process" at 37,129.2 h1.5
  text "AD8138ARZ" at 26,114 h1 r270
  text "AD8138ARZ" at 30,114 h1 r270
  text "ADC Ch1" at 98.5,110.4 h1.5
  text "ADC Ch2" at 79.6,110.3 h1.5
  text "ADC / CLK" at 108.3,110 h1.5
  text "ADA4817" at 26,104 h1 r270
  text "ADA4817" at 30,104 h1 r270
  text "Power Switch" at 188.75,100.75 h1.5
  text "Range Selector" at 38.1,100.6 h1.5
  text "AD9288BSTZ" at 79,89 h1
  text "AD9288BSTZ" at 99,89 h1
  text "RST" at 116.25,88.5 h1.5
  text "K3" at 121.25,88.5 h1.5
  text "K2" at 126.75,88.5 h1.5
  text "K1" at 132.25,88.5 h1.5
  text "Charger" at 182.5,79.5 h1.5
  text "ZYNQ7020" at 92.5,78.75 h2.5
  text "GND" at 187.5,68 h1
  text "DCDC 5V to Dual 3V3" at 136.75,67.7 h1.5
  text "5V" at 186.75,65.75 h1
  text "VBAT" at 188.5,63 h1
  text "D+" at 186.5,60.5 h1
  text "D-" at 186.5,58 h1
  text "HIGH-Z INPUT" at 36,57.5 h1.5
  text "STM32" at 86.75,54.25 h2.5
  text "USB-HUB" at 125.75,54.25 h2.5
  text "VERTICAL" at 83,38.5 h1.5
  text "HORIZONTAL" at 119.75,38.5 h1.5
  text "TRIGGER" at 141.5,38.5 h1.5
  text "FUNCTIONAL" at 167.25,38.5 h1.5
  text "ACQUIRE" at 186.25,38.5 h1.5
  text "CH1 ENCODER" at 74.25,36 h1.5
  text "CH2 ENCODER" at 96.25,36 h1.5
  text "TIME ENCODER" at 121.25,36 h1.5
  text "TRG LEVEL" at 142.25,35.75 h1.5
  text "FUNC ENCODER" at 169.25,35.75 h1.5
  text "Scale/Position" at 119.25,34.25 h1
  text "Scale/Position" at 72.5,34 h1
  text "Scale/Position" at 94.75,34 h1
  text "Press: Apply" at 141.75,34 h1
  text "Hold: Save Screen+Wave" at 171,34 h1
  text "RUN LED" at 186.5,31.25 h1.5
  text "Differential Input / 1 MOhm each side to GND" at 25.55,22 h1
  text "Differential Input / 1 MOhm each side to GND" at 54.225,22 h1
  text "RUN/STOP" at 187.25,22 h1.5
  text "Hold: Force Trig" at 189,20.25 h1
  text "CH1 ENABLE" at 73.5,14.75 h1.5
  text "CH2 ENABLE" at 95.75,14.75 h1.5
  text "CURSOR" at 118.25,14.75 h1.5
  text "TRG MODE" at 141.75,14.75 h1.5
  text "MENU/BACK" at 167.5,14.75 h1.5
  text "Press: Config Ch" at 74,13.25 h1
  text "Press: Config Ch" at 95.75,13.25 h1
  text "None/Horizontal/Vertical" at 124.25,13.25 h1
  text "Auto/Signle/Normal" at 144.25,13.25 h1
  text "Hold: Zoom" at 165.5,13.25 h1
  text "CHANNEL 1" at 19.7,5.6 h1.5
  text "CHANNEL 2" at 48.1,5.6 h1.5
Mechanical 1:
  the board outline again, w0.254

## Text inside footprints (layer, text, board x,y; h text height)
"VT1_Channel 0": Bottom Overlay ">" at 13.65,150.24 h0.8 r90
"VT1_Channel 1": Bottom Overlay ">" at 31.15,150.24 h0.8 r90
"VT2_Channel 0": Bottom Overlay ">" at 9.65,150.24 h0.8 r90
"VT2_Channel 1": Bottom Overlay ">" at 35.15,150.24 h0.8 r90
"VT3_Channel 0": Bottom Overlay ">" at 5.65,150.24 h0.8 r90
"VT3_Channel 1": Bottom Overlay ">" at 39.15,150.24 h0.8 r90
VT4: Bottom Overlay ">" at 183.45,94.26 h0.8 r270